# EAGLE board toy_redesign (EAGLE 7.4.0)

Size 50.47 x 8.88 mm. Coordinates in mm from the lower left corner, seen from the top.
Outline: 0,0 50.47,0 50.47,8.88 0,8.88 0,0
Copper layers (1*16): Top 0.035mm / dielectric 1.5mm / Bottom 0.035mm
Design rules "default": minimum track width 10mil, minimum drill 24mil, track to track 8mil, track to pad 8mil, pad to pad 8mil, via to via 8mil, smd to smd 8mil, copper to edge 40mil, drill to drill 8mil, minimum pad ring 10mil, minimum via ring 8mil, stop-mask expansion 4mil, vias tented up to drill 0mil, thermal gap 10mil

## Footprints (pad centres in the part's own frame; a part is rotated, then mirrored left to right if it is on the bottom)
TSSOP20 = smd 0.305 x 0.991: 1 -2.925,-2.918; 2 -2.275,-2.918; 3 -1.625,-2.918; 4 -0.975,-2.918; 5 -0.325,-2.918; 6 0.325,-2.918; 7 0.975,-2.918; 8 1.625,-2.918; 9 2.275,-2.918; 10 2.925,-2.918; 11 2.925,2.918; 12 2.275,2.918; 13 1.625,2.918; 14 0.975,2.918; 15 0.325,2.918; 16 -0.325,2.918; 17 -0.975,2.918; 18 -1.625,2.918; 19 -2.275,2.918; 20 -2.925,2.918
LED3MM = drill 0.813 octagon: A -1.27,0; K 1.27,0

## Placement (x,y rotation side)
IC1  STM8S003F3  [TSSOP20]  5.08,-3.81 0 top
LED1  [LED3MM]  2.54,2.54 0 top
LED2  [LED3MM]  6.35,2.54 0 top
LED3  [LED3MM]  10.16,2.54 0 top
LED4  [LED3MM]  13.97,2.54 0 top
LED5  [LED3MM]  17.78,2.54 0 top
LED6  [LED3MM]  21.59,2.54 0 top
LED7  [LED3MM]  25.4,2.54 0 top
LED8  [LED3MM]  29.21,2.54 0 top
LED9  [LED3MM]  33.02,2.54 0 top
LED10  [LED3MM]  36.83,2.54 0 top

## Library data of the parts
IC1 = stm8
LED1-LED10 = led

## Nets
AUDIO_PWM: IC1.14
GND: IC1.7
VCAP: IC1.8
VDD: IC1.9